# EAGLE board CT Quadline Quads (EAGLE 8.3.1)
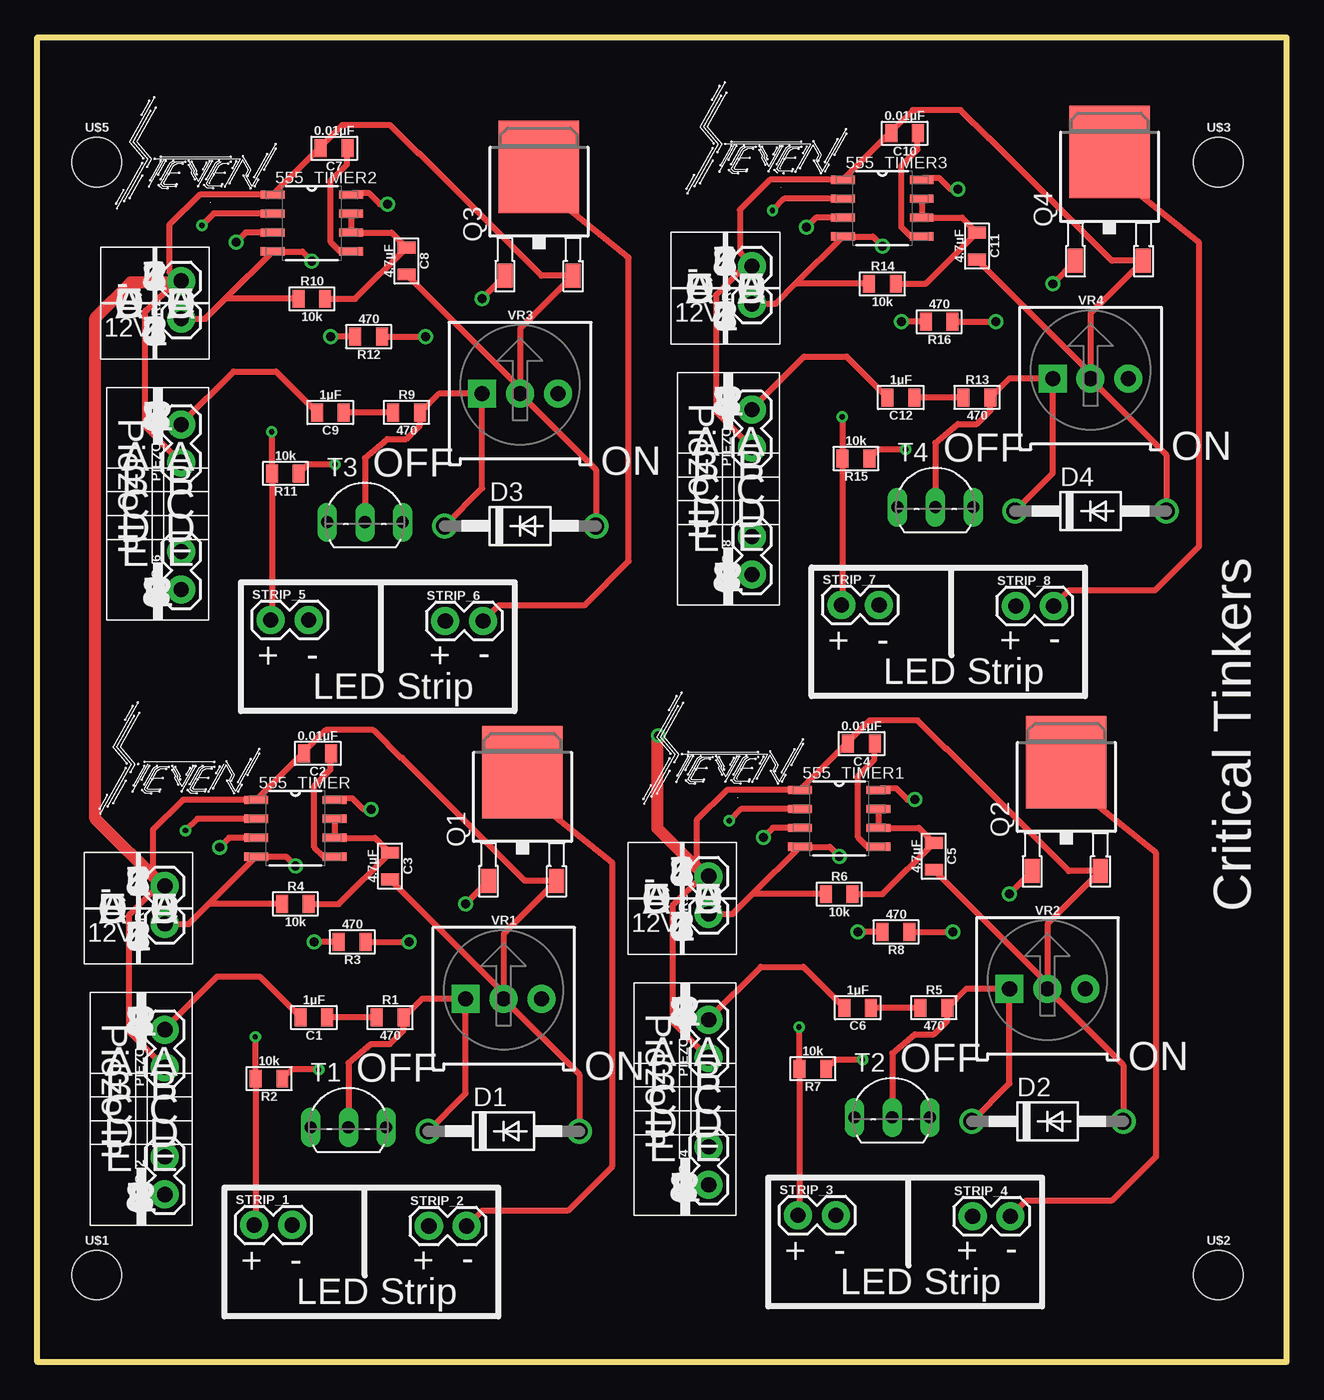
[diagram p0: board, top side]
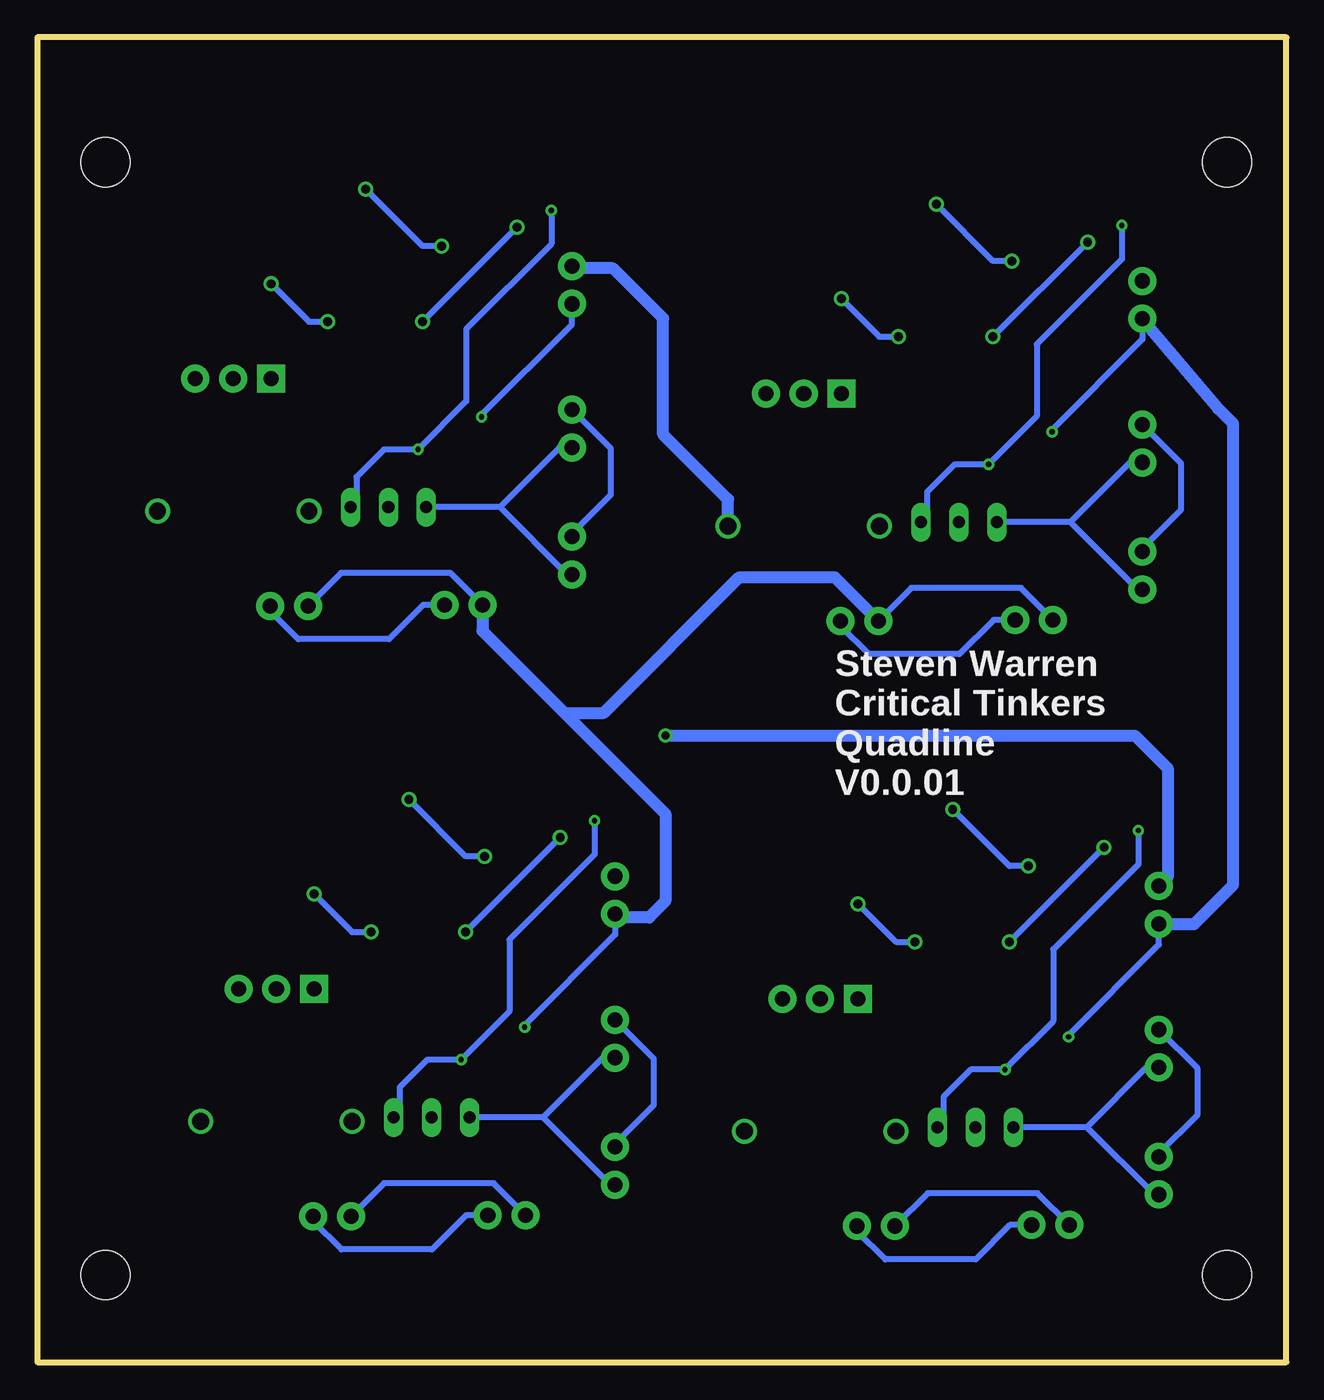
[diagram p1: board, bottom side, seen from below]

Size 83.82 x 88.9 mm. Coordinates in mm from the lower left corner, seen from the top.
Outline: 0,0 0,88.9 83.82,88.9 83.82,0 0,0
Copper layers (1*16): Top 0.035mm / dielectric 1.5mm / Bottom 0.035mm
Design rules "default": minimum track width 10mil, minimum drill 24mil, track to track 8mil, track to pad 8mil, pad to pad 8mil, via to via 8mil, smd to smd 8mil, copper to edge 40mil, drill to drill 8mil, minimum pad ring 10mil, minimum via ring 8mil, stop-mask expansion 4mil, vias tented up to drill 0mil, thermal gap 10mil

## Footprints (pad centres in the part's own frame; a part is rotated, then mirrored left to right if it is on the bottom)
SOIC127P600X175-8N = smd 1.6 x 0.559: 1 -2.642,1.905; 2 -2.642,0.635; 3 -2.642,-0.635; 4 -2.642,-1.905; 5 2.642,-1.905; 6 2.642,-0.635; 7 2.642,0.635; 8 2.642,1.905
0805 = smd 0.8 x 1.2: 1 -0.9,0; 2 0.9,0
DO41-10 = drill 1.118: A 5.08,0; C -5.08,0
1X02 = drill 1.016 pad 1.88: 1 0,0; 2 2.54,0
TO252 = smd 1 x 1.6: 1 -2.28,-4.8; 2 2.28,-4.8 | smd 5.4 x 6.2: 3 0,2.5
TO92-EBC-OVAL = drill 0.813 long: B 0,-1.27; C 2.54,-1.27; E -2.54,-1.27
STAND-OFF = hole 3.302: 0,0
TRIMPOT-PTH-3386U = drill 1.016 pad 1.88 square: 1 -2.54,-0.015 | drill 1.016 pad 1.88: 2 0,-0.015; 3 2.54,-0.015

## Placement (x,y rotation side)
555_TIMER  LM555CM  [SOIC127P600X175-8N]  17.32,35.83 0 top
555_TIMER1  LM555CM  [SOIC127P600X175-8N]  53.81,36.49 0 top
555_TIMER2  LM555CM  [SOIC127P600X175-8N]  18.43,76.43 0 top
555_TIMER3  LM555CM  [SOIC127P600X175-8N]  56.7,77.43 0 top
C1  1µF  [0805]  18.56,23.13 180 top
C2  0.01µF  [0805]  18.82,40.85 180 top
C3  4.7µF  [0805]  23.67,33.29 270 top
C4  0.01µF  [0805]  55.3,41.51 180 top
C5  4.7µF  [0805]  60.16,33.95 270 top
C6  1µF  [0805]  55.05,23.79 180 top
C7  0.01µF  [0805]  19.92,81.45 180 top
C8  4.7µF  [0805]  24.78,73.89 270 top
C9  1µF  [0805]  19.67,63.73 180 top
C10  0.01µF  [0805]  58.2,82.45 180 top
C11  4.7µF  [0805]  63.05,74.89 270 top
C12  1µF  [0805]  57.94,64.73 180 top
D1  1N4006  [DO41-10]  31.29,15.51 0 top
D2  1N4006  [DO41-10]  67.78,16.17 0 top
D3  1N4006  [DO41-10]  32.4,56.11 0 top
D4  1N4006  [DO41-10]  70.67,57.11 0 top
PIEZO_1  [1X02]  8.56,19.77 90 top
PIEZO_2  [1X02]  8.56,11.25 90 top
PIEZO_3  [1X02]  45.05,20.43 90 top
PIEZO_4  [1X02]  45.05,11.91 90 top
PIEZO_5  [1X02]  9.67,60.38 90 top
PIEZO_6  [1X02]  9.67,51.85 90 top
PIEZO_7  [1X02]  47.95,61.38 90 top
PIEZO_8  [1X02]  47.95,52.86 90 top
PWR  [1X02]  8.56,29.41 90 top
PWR1  [1X02]  45.05,30.07 90 top
PWR2  [1X02]  9.67,70.01 90 top
PWR3  [1X02]  47.95,71.01 90 top
Q1  RFD14N05SM9A  [TO252]  32.56,37.1 0 top
Q2  RFD14N05SM9A  [TO252]  69.05,37.76 0 top
Q3  RFD14N05SM9A  [TO252]  33.67,77.7 0 top
Q4  RFD14N05SM9A  [TO252]  71.94,78.7 0 top
R1  470  [0805]  23.67,23.13 0 top
R2  10k  [0805]  15.55,19.03 180 top
R3  470  [0805]  21.13,28.21 180 top
R4  10k  [0805]  17.32,30.75 0 top
R5  470  [0805]  60.16,23.79 0 top
R6  10k  [0805]  53.81,31.41 0 top
R7  10k  [0805]  52.03,19.69 180 top
R8  470  [0805]  57.62,28.87 180 top
R9  470  [0805]  24.78,63.73 0 top
R10  10k  [0805]  18.43,71.35 0 top
R11  10k  [0805]  16.65,59.63 180 top
R12  470  [0805]  22.24,68.81 180 top
R13  470  [0805]  63.05,64.73 0 top
R14  10k  [0805]  56.7,72.35 0 top
R15  10k  [0805]  54.93,60.64 180 top
R16  470  [0805]  60.51,69.81 180 top
STRIP_1  [1X02]  14.56,9.21 0 top
STRIP_2  [1X02]  26.27,9.14 0 top
STRIP_3  [1X02]  51.05,9.87 0 top
STRIP_4  [1X02]  62.76,9.8 0 top
STRIP_5  [1X02]  15.67,49.81 0 top
STRIP_6  [1X02]  27.38,49.74 0 top
STRIP_7  [1X02]  53.95,50.81 0 top
STRIP_8  [1X02]  65.66,50.74 0 top
T1  2N2222  [TO92-EBC-OVAL]  20.88,17.03 0 top
T2  2N2222  [TO92-EBC-OVAL]  57.36,17.69 0 top
T3  2N2222  [TO92-EBC-OVAL]  21.98,57.63 0 top
T4  2N2222  [TO92-EBC-OVAL]  60.26,58.64 0 top
U$1  [STAND-OFF]  3.99,5.84 0 top
U$2  [STAND-OFF]  79.25,5.84 0 top
U$3  [STAND-OFF]  79.25,80.52 0 top
U$5  [STAND-OFF]  3.99,80.52 0 top
VR1  10k  [TRIMPOT-PTH-3386U]  31.29,24.4 0 top
VR2  10k  [TRIMPOT-PTH-3386U]  67.78,25.06 0 top
VR3  10k  [TRIMPOT-PTH-3386U]  32.4,65 0 top
VR4  10k  [TRIMPOT-PTH-3386U]  70.67,66 0 top

## Library data of the parts
555_TIMER 555_TIMER1-555_TIMER3 = 555-Timer-Fairchild; MPN: LM555CM; OC_FARNELL: -; OC_NEWARK: 78K6011; PACKAGE: SOIC-8; SUPPLIER: FAIRCHILD
C1-C12 = SparkFun-Capacitors; PROD_ID: CAP-08469
D1-D4 = diode
PIEZO_1-PIEZO_8 PWR PWR1-PWR3 STRIP_1-STRIP_8 = SparkFun-Connectors
Q1-Q4 = transistor-fet
R1-R16 = SparkFun-Resistors; PROD_ID: RES-09883
T1-T4 = adafruit
U$1-U$3 U$5 = SparkFun-Hardware
VR1-VR4 = SparkFun-Resistors; PROD_ID: RES-09730; SF_SKU: COM-09806

## Nets
12V: 555_TIMER1.4 555_TIMER1.8 555_TIMER2.4 555_TIMER2.8 555_TIMER3.4 555_TIMER3.8 555_TIMER.4 555_TIMER.8 PWR1.1 PWR2.1 PWR3.1 PWR.1 R2.2 R4.1 R6.1 R7.2 R10.1 R11.2 R14.1 R15.2 STRIP_1.1 STRIP_2.1 STRIP_3.1 STRIP_4.1 STRIP_5.1 STRIP_6.1 STRIP_7.1 STRIP_8.1
GATE: Q1.1 R3.1
GATE1: Q2.1 R8.1
GATE2: Q3.1 R12.1
GATE3: Q4.1 R16.1
GND: 555_TIMER1.1 555_TIMER2.1 555_TIMER3.1 555_TIMER.1 C2.2 C3.2 C4.2 C5.2 C7.2 C8.2 C10.2 C11.2 D1.A D2.A D3.A D4.A PIEZO_1.1 PIEZO_2.1 PIEZO_3.1 PIEZO_4.1 PIEZO_5.1 PIEZO_6.1 PIEZO_7.1 PIEZO_8.1 PWR1.2 PWR2.2 PWR3.2 PWR.2 Q1.2 Q2.2 Q3.2 Q4.2 T1.E T2.E T3.E T4.E VR1.2 VR2.2 VR3.2 VR4.2
N$1: C1.1 R1.1
N$2: C6.2 PIEZO_3.2 PIEZO_4.2
N$3: 555_TIMER.3 R3.2
N$4: 555_TIMER.5 C2.1
N$5: C1.2 PIEZO_1.2 PIEZO_2.2
N$6: 555_TIMER1.5 C4.1
N$7: 555_TIMER1.6 555_TIMER1.7 C5.1 R6.2
N$8: 555_TIMER.6 555_TIMER.7 C3.1 R4.2
N$9: C6.1 R5.1
N$10: 555_TIMER1.3 R8.2
N$11: C9.2 PIEZO_5.2 PIEZO_6.2
N$12: 555_TIMER2.5 C7.1
N$13: 555_TIMER2.6 555_TIMER2.7 C8.1 R10.2
N$14: C9.1 R9.1
N$15: 555_TIMER2.3 R12.2
N$16: C12.2 PIEZO_7.2 PIEZO_8.2
N$17: 555_TIMER3.5 C10.1
N$18: 555_TIMER3.6 555_TIMER3.7 C11.1 R14.2
N$19: C12.1 R13.1
N$20: 555_TIMER3.3 R16.2
NO_CONNECT_TO_TRIGGER: D1.C R1.2 T1.B VR1.1
NO_CONNECT_TO_TRIGGER1: D2.C R5.2 T2.B VR2.1
NO_CONNECT_TO_TRIGGER2: D3.C R9.2 T3.B VR3.1
NO_CONNECT_TO_TRIGGER3: D4.C R13.2 T4.B VR4.1
STRIP_GND_0: Q1.3 STRIP_1.2 STRIP_2.2
STRIP_GND_1: Q2.3 STRIP_3.2 STRIP_4.2
STRIP_GND_2: Q3.3 STRIP_5.2 STRIP_6.2
STRIP_GND_3: Q4.3 STRIP_7.2 STRIP_8.2
TRIGGER: 555_TIMER.2 R2.1 T1.C
TRIGGER1: 555_TIMER1.2 R7.1 T2.C
TRIGGER2: 555_TIMER2.2 R11.1 T3.C
TRIGGER3: 555_TIMER3.2 R15.1 T4.C

## Tracks (layer width: path | path; a pad name or v marks a point on that pad's centre or on a via)
12V  (via drill 0.35, 0.6)
  Top 0.406: 20.5,37.73 555_TIMER.8 20.09,37.86 21.13,37.86 21.89,37.1 v22.4,37.1 | v17.32,33.29 16.68,33.92 555_TIMER.4 11.5,30.75 | PWR.1 10.16,29.41 11.5,30.75 | R4.1 11.5,30.75 | v14.63,21.83 14.63,19.05 R2.2 14.65,9.29 STRIP_1.1 | 21.6,78.33 555_TIMER2.8 21.19,78.46 22.23,78.46 23,77.7 v23.5,77.7 | v18.43,73.89 17.79,74.52 555_TIMER2.4 12.61,71.35 | PWR2.1 11.27,70.01 12.61,71.35 | R10.1 12.61,71.35 | v15.73,62.43 15.73,59.65 R11.2 15.75,49.89 STRIP_5.1 | 59.88,79.34 555_TIMER3.8 59.47,79.46 60.51,79.46 61.27,78.7 v61.78,78.7 | v56.7,74.89 56.07,75.53 555_TIMER3.4 50.89,72.35 | PWR3.1 49.55,71.01 50.89,72.35 | R14.1 50.89,72.35 | v54.01,63.43 54.01,60.66 R15.2 54.03,50.89 STRIP_7.1 | 56.98,38.39 555_TIMER1.8 56.58,38.52 57.62,38.52 58.38,37.76 v58.89,37.76 | v53.81,33.95 53.17,34.58 555_TIMER1.4 47.99,31.41 | PWR1.1 46.65,30.07 47.99,31.41 | R6.1 47.99,31.41 | v51.12,22.49 51.12,19.71 R7.2 51.13,9.95 STRIP_3.1
  Bottom 0.406: v22.4,37.1 18.59,33.29 v17.32,33.29 | PWR.1 8.56,28.03 14.65,21.93 14.65,21.84 v14.63,21.83 | STRIP_1.1 16.71,11.35 24.06,11.35 STRIP_2.1 | v23.5,77.7 19.7,73.89 v18.43,73.89 | PWR2.1 9.67,68.63 15.76,62.53 15.76,62.44 v15.73,62.43 | STRIP_5.1 17.81,51.95 25.17,51.95 STRIP_6.1 | v61.78,78.7 57.97,74.89 v56.7,74.89 | PWR3.1 47.95,69.63 54.03,63.54 54.03,63.45 v54.01,63.43 | STRIP_7.1 56.09,52.95 63.45,52.95 STRIP_8.1 | v58.89,37.76 55.08,33.95 v53.81,33.95 | PWR1.1 45.05,29.99 45.05,28.69 51.14,22.59 51.14,22.5 v51.12,22.49 | STRIP_3.1 53.19,12.01 60.55,12.01 STRIP_4.1
  Bottom 0.813: 8.17,29.41 PWR.1 6.2,29.41 3.58,32.03 3.58,62.97 4.58,63.97 PWR2.1 | STRIP_7.1 53.95,49.07 48.45,43.57 | 48.45,43.57 41.67,36.79 41.67,30.95 42.77,29.84 44.91,29.84 45.05,29.99 | 48.45,43.57 45.8,43.57 36.69,52.68 30.32,52.68 STRIP_6.1
GATE  (via drill 0.6)
  Top 0.406: R3.1 v24.94,28.21 | v28.75,30.75 28.75,30.77 Q1.1
  Bottom 0.406: v28.75,30.75 26.21,28.21 v24.94,28.21
GATE1  (via drill 0.6)
  Top 0.406: R8.1 v61.43,28.87 | v65.24,31.41 65.24,31.43 Q2.1
  Bottom 0.406: v65.24,31.41 62.7,28.87 v61.43,28.87
GATE2  (via drill 0.6)
  Top 0.406: R12.1 v26.05,68.81 | v29.86,71.35 29.86,71.37 Q3.1
  Bottom 0.406: v29.86,71.35 27.32,68.81 v26.05,68.81
GATE3  (via drill 0.6)
  Top 0.406: R16.1 v64.32,69.81 | v68.13,72.35 68.13,72.37 Q4.1
  Bottom 0.406: v68.13,72.35 65.59,69.81 v64.32,69.81
GND  (via drill 0.55)
  Top 0.406: VR1.2 31.29,28.75 Q1.2 32.73,32.3 24.5,40.52 | VR1.2 36.37,19.3 D1.A | 18.34,15.14 T1.E | PIEZO_1.1 6.15,22.19 6.15,29.98 8.12,31.95 PWR.2 8.61,32 7.75,32.85 7.75,35.71 9.78,37.73 555_TIMER.1 17.79,40.85 | VR1.2 31.29,24.77 C3.2 | 17.79,40.85 C2.2 | 24.5,40.52 24.49,40.55 | 24.5,40.52 24.46,40.52 22.57,42.41 19.36,42.41 17.79,40.85 | VR3.2 32.4,69.35 Q3.2 33.83,72.9 25.61,81.12 | VR3.2 37.48,59.9 D3.A | 19.44,55.74 T3.E | PIEZO_5.1 7.25,62.79 7.25,70.58 7.35,70.58 9.21,72.44 | VR3.2 32.4,65.37 C8.2 | 18.9,81.45 C7.2 | 18.9,81.45 555_TIMER2.1 10.88,78.33 8.86,76.31 8.86,73.14 9.56,72.44 | 25.61,81.12 25.59,81.15 | 25.61,81.12 25.56,81.12 23.67,83.01 20.46,83.01 18.9,81.45 | VR4.2 70.67,70.35 Q4.2 72.11,73.9 63.89,82.12 | VR4.2 75.75,60.91 D4.A | 57.72,56.75 T4.E | PIEZO_7.1 45.53,63.8 45.53,71.58 47.5,73.55 PWR3.2 47.99,73.6 47.14,74.46 47.14,77.31 49.16,79.34 555_TIMER3.1 57.17,82.45 | VR4.2 70.67,66.37 C11.2 | 57.17,82.45 C10.2 | 63.89,82.12 63.87,82.15 | 63.89,82.12 63.84,82.12 61.95,84.01 58.74,84.01 57.17,82.45 | VR2.2 67.78,29.41 Q2.2 69.21,32.96 60.99,41.18 | VR2.2 72.86,19.96 D2.A | 54.82,15.8 T2.E | PIEZO_3.1 42.63,22.85 42.63,30.64 44.6,32.61 PWR1.2 45.09,32.66 44.24,33.51 44.24,36.37 46.26,38.39 555_TIMER1.1 54.28,41.51 | VR2.2 67.78,25.43 C5.2 | 54.28,41.51 C4.2 | 60.99,41.18 60.98,41.21 | 60.99,41.18 60.95,41.18 59.05,43.07 55.84,43.07 54.28,41.51
  Top 0.813: PWR.2 8.41,31.95 3.9,36.46 3.9,70.08 6.26,72.44 9.21,72.44 9.56,72.44 PWR2.2 | PWR1.2 44.82,32.61 41.6,35.83 41.6,41.99 v41.67,42.05
  Bottom 0.406: PIEZO_1.1 9.39,19.77 13.4,15.77 | 13.4,15.77 T1.E | PIEZO_2.1 8.88,11.25 13.4,15.77 | PIEZO_5.1 10.5,60.38 14.51,56.37 | 14.51,56.37 T3.E | PIEZO_6.1 9.99,51.85 14.51,56.37 | PIEZO_7.1 48.78,61.38 52.78,57.37 | 52.78,57.37 T4.E | PIEZO_8.1 48.27,52.86 52.78,57.37 | PIEZO_3.1 45.88,20.43 49.89,16.43 | 49.89,16.43 T2.E | PIEZO_4.1 45.37,11.91 49.89,16.43
  Bottom 0.813: PWR1.2 | PWR.2 7.98,32.53 7.98,39.84 10.19,42.05 v41.67,42.05 | D3.A 37.48,57.9 41.83,62.26 41.83,70.04 45.2,73.41 47.8,73.41 PWR3.2
N$1
  Top 0.406: R1.1 C1.1
N$2
  Top 0.406: PIEZO_3.2 45.05,23.03 48.55,26.53 51.4,26.53 C6.2
  Bottom 0.406: PIEZO_4.2 45.05,14.66 42.44,17.27 42.44,20.37 PIEZO_3.2
N$3  (via drill 0.6)
  Top 0.406: R3.2 v18.59,28.21 | 555_TIMER.3 12.88,35.19 v12.24,34.56
  Bottom 0.406: v18.59,28.21 v12.24,34.56
N$4
  Top 0.406: 555_TIMER.5 19.23,33.92 18.59,34.56 18.59,38.67 19.68,39.76 19.68,40.81 C2.1
N$5
  Top 0.406: PIEZO_1.2 8.56,22.37 12.07,25.87 14.91,25.87 C1.2
  Bottom 0.406: PIEZO_2.2 8.56,14 5.96,16.61 5.96,19.71 PIEZO_1.2
N$6
  Top 0.406: 555_TIMER1.5 55.71,34.58 55.08,35.22 55.08,39.33 56.17,40.42 56.17,41.47 C4.1
N$7
  Top 0.406: R6.2 56.72,31.41 C5.1 59.15,35.85 555_TIMER1.6 555_TIMER1.7
N$8
  Top 0.406: R4.2 20.23,30.75 C3.1 22.66,35.19 555_TIMER.6 555_TIMER.7
N$9
  Top 0.406: R5.1 C6.1
N$10  (via drill 0.6)
  Top 0.406: R8.2 v55.08,28.87 | 555_TIMER1.3 49.36,35.85 v48.73,35.22
  Bottom 0.406: v55.08,28.87 v48.73,35.22
N$11
  Top 0.406: PIEZO_5.2 9.67,62.97 13.17,66.47 16.02,66.47 C9.2
  Bottom 0.406: PIEZO_6.2 9.67,54.6 7.06,57.21 7.06,60.31 PIEZO_5.2
N$12
  Top 0.406: 555_TIMER2.5 20.33,74.52 19.7,75.16 19.7,79.28 20.79,80.37 20.79,81.41 C7.1
N$13
  Top 0.406: R10.2 21.34,71.35 C8.1 23.77,75.79 555_TIMER2.6 555_TIMER2.7
N$14
  Top 0.406: R9.1 C9.1
N$15  (via drill 0.6)
  Top 0.406: R12.2 v19.7,68.81 | 555_TIMER2.3 13.98,75.79 v13.35,75.16
  Bottom 0.406: v19.7,68.81 v13.35,75.16
N$16
  Top 0.406: PIEZO_7.2 47.95,63.97 51.45,67.48 54.3,67.48 C12.2
  Bottom 0.406: PIEZO_8.2 47.95,55.61 45.34,58.21 45.34,61.31 PIEZO_7.2
N$17
  Top 0.406: 555_TIMER3.5 58.61,75.53 57.97,76.16 57.97,80.28 59.06,81.37 59.06,82.42 C10.1
N$18
  Top 0.406: R14.2 59.61,72.35 C11.1 62.05,76.8 555_TIMER3.6 555_TIMER3.7
N$19
  Top 0.406: R13.1 C12.1
N$20  (via drill 0.6)
  Top 0.406: R16.2 v57.97,69.81 | 555_TIMER3.3 52.26,76.8 v51.62,76.16
  Bottom 0.406: v57.97,69.81 v51.62,76.16
NO_CONNECT_TO_TRIGGER
  Top 0.406: T1.B 20.88,20.08 22.4,21.35 23.67,21.35 24.57,22.25 R1.2 25.82,24.38 VR1.1 28.75,18.05 D1.C
NO_CONNECT_TO_TRIGGER1
  Top 0.406: T2.B 57.36,20.74 58.89,22.01 60.16,22.01 61.06,22.91 R5.2 62.31,25.04 VR2.1 65.24,18.71 D2.C
NO_CONNECT_TO_TRIGGER2
  Top 0.406: T3.B 21.98,60.68 23.5,61.95 24.77,61.95 25.68,62.85 R9.2 26.93,64.98 VR3.1 29.86,58.65 D3.C
NO_CONNECT_TO_TRIGGER3
  Top 0.406: T4.B 60.26,61.68 61.78,62.95 63.05,62.95 63.95,63.85 R13.2 65.21,65.99 VR4.1 68.13,59.65 D4.C
STRIP_GND_0
  Top 0.406: Q1.3 32.56,38.37 38.58,33.51 38.58,13.15 35.61,10.17 29.85,10.17 STRIP_2.2
  Bottom 0.406: 17.18,9.21 STRIP_1.2 18.55,9.21 20.85,6.91 26.93,6.91 28.81,8.79 STRIP_2.2
STRIP_GND_1
  Top 0.406: Q2.3 69.05,39.03 75.07,34.17 75.07,13.81 72.09,10.83 66.33,10.83 STRIP_4.2
  Bottom 0.406: 53.67,9.87 STRIP_3.2 55.03,9.87 57.33,7.57 63.41,7.57 65.3,9.45 STRIP_4.2
STRIP_GND_2
  Top 0.406: Q3.3 33.66,78.97 39.69,74.11 39.69,53.75 36.71,50.77 30.95,50.77 STRIP_6.2
  Bottom 0.406: 18.29,49.81 STRIP_5.2 19.65,49.81 21.95,47.51 28.03,47.51 29.92,49.4 STRIP_6.2
STRIP_GND_3
  Top 0.406: Q4.3 71.94,79.97 77.97,75.11 77.97,54.75 74.99,51.78 69.23,51.78 STRIP_8.2
  Bottom 0.406: 56.56,50.81 STRIP_7.2 57.93,50.81 60.23,48.51 66.31,48.51 68.2,50.4 STRIP_8.2
TRIGGER  (via drill 0.35)
  Top 0.406: 555_TIMER.2 10.73,36.46 v9.94,35.67 | v18.89,19.64 17.05,19.64 R2.1
  Bottom 0.406: v9.94,35.67 9.94,33.42 15.66,27.7 15.66,22.87 v18.89,19.64 21.17,19.64 23.01,17.8 23.01,16.17 T1.C
TRIGGER1  (via drill 0.35)
  Top 0.406: 555_TIMER1.2 47.22,37.12 v46.43,36.33 | v55.38,20.3 53.54,20.3 R7.1
  Bottom 0.406: v46.43,36.33 46.43,34.08 52.14,28.36 52.14,23.53 v55.38,20.3 57.65,20.3 59.5,18.46 59.5,16.83 T2.C
TRIGGER2  (via drill 0.35)
  Top 0.406: 555_TIMER2.2 11.84,77.06 v11.05,76.27 | v19.99,60.24 18.16,60.24 R11.1
  Bottom 0.406: v11.05,76.27 11.05,74.02 16.76,68.3 16.76,63.47 v19.99,60.24 22.27,60.24 24.11,58.4 24.11,56.77 T3.C
TRIGGER3  (via drill 0.35)
  Top 0.406: 555_TIMER3.2 50.11,78.07 v49.32,77.28 | v58.27,61.24 56.44,61.24 R15.1
  Bottom 0.406: v49.32,77.28 49.32,75.02 55.04,69.31 55.04,64.47 v58.27,61.24 60.55,61.24 62.39,59.4 62.39,57.77 T4.C

## Text on the board
tPlace: - | - | 12V | 12V | Piezo In | Piezo In | ON | ON | OFF | OFF | + | - | + | - | + | - | + | - | LED Strip | LED Strip | - | - | Critical Tinkers | 12V | 12V | Piezo In | Piezo In | ON | OFF | ON | OFF | + | - | + | - | + | - | + | - | LED Strip | LED Strip | C:/Users/Matrix/Documents/eagle/CT QuadlineV2/Iowa_State_Logo.bmp
bNames: Steven Warren / Critical Tinkers / Quadline / V0.0.01